# Altium PCB APD_Design.PcbDoc
Units mil, origin at the board's own origin, x right, y up, seen from the top; angles counter-clockwise.
Board outline 2700 x 2100 mil, 2 copper layers (Top Layer, Bottom Layer); 39 components, 17 nets, 140 pads, 12 vias.
Unrouted connection lines stored in the file: 2.
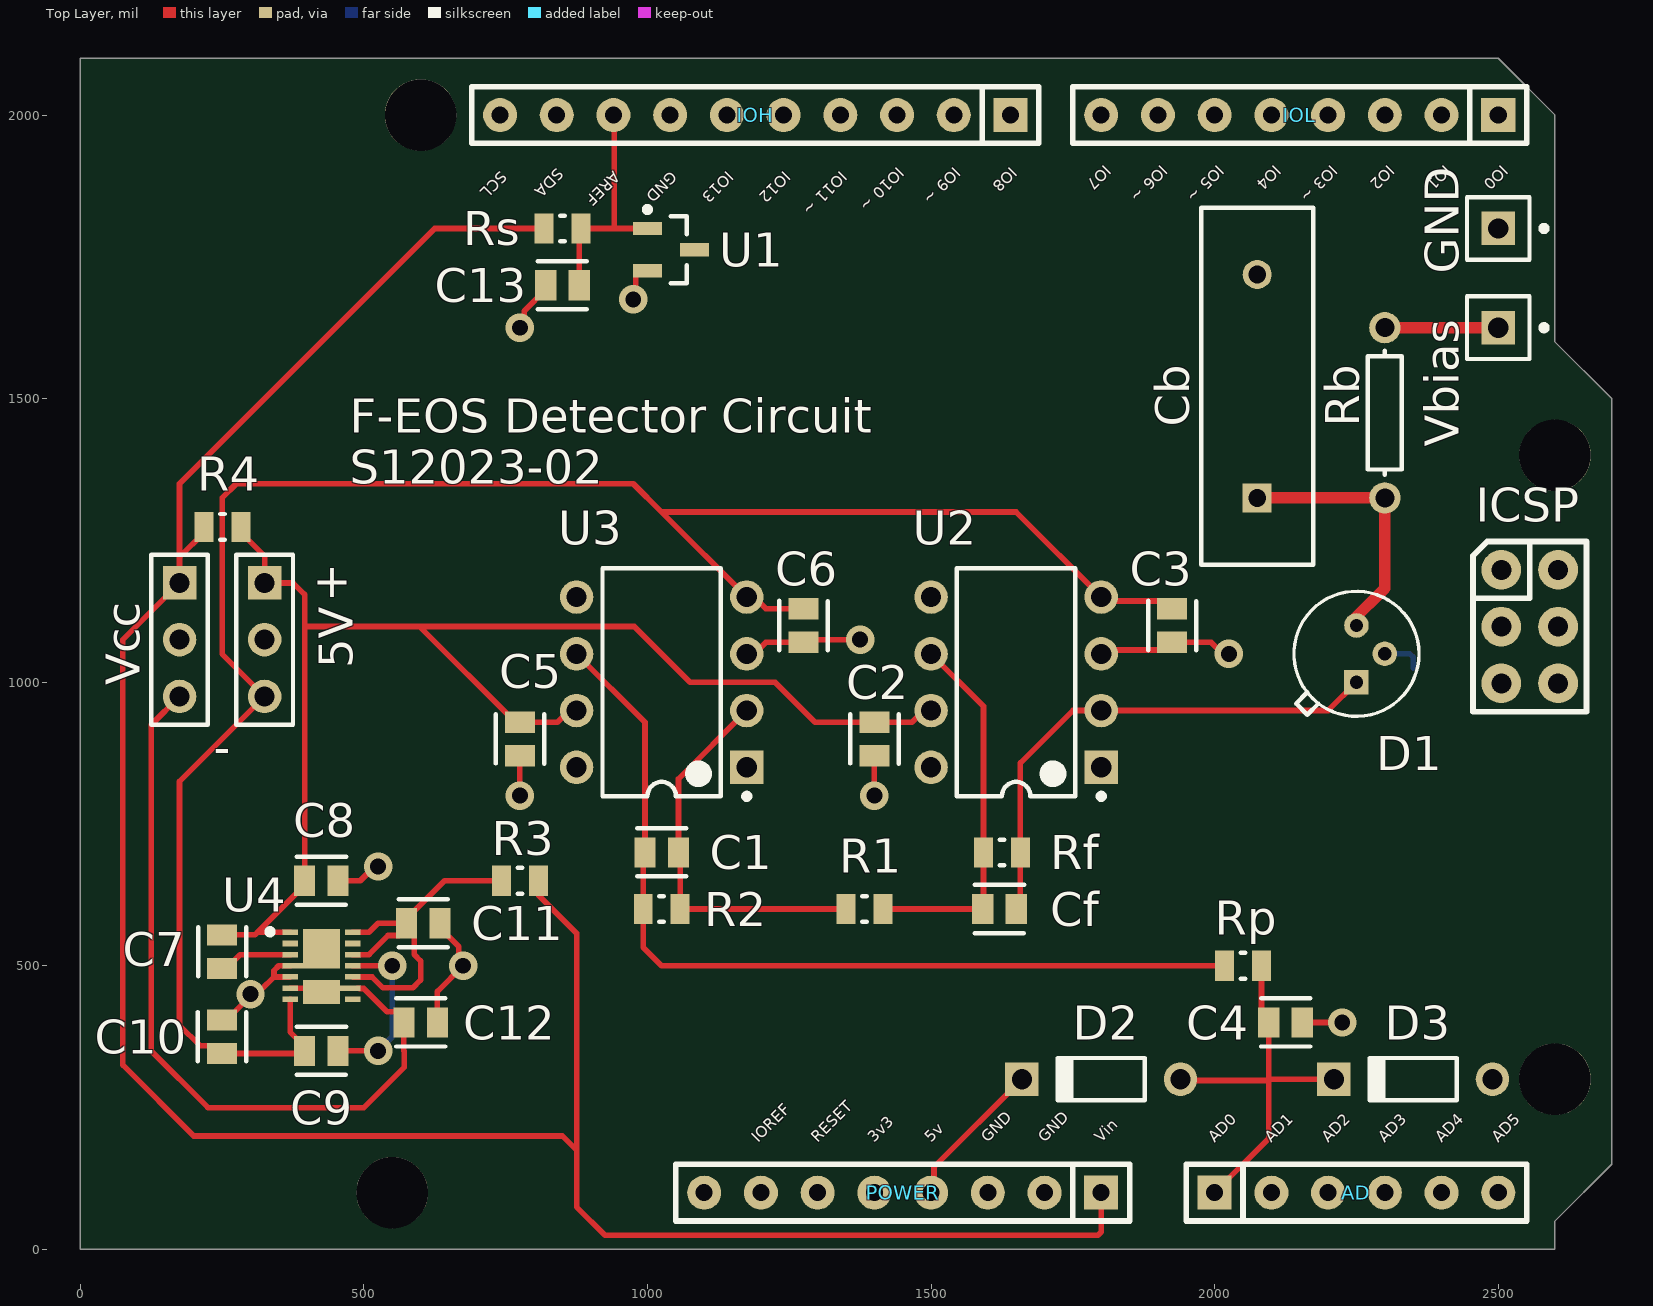
[diagram p0: Top Layer view]
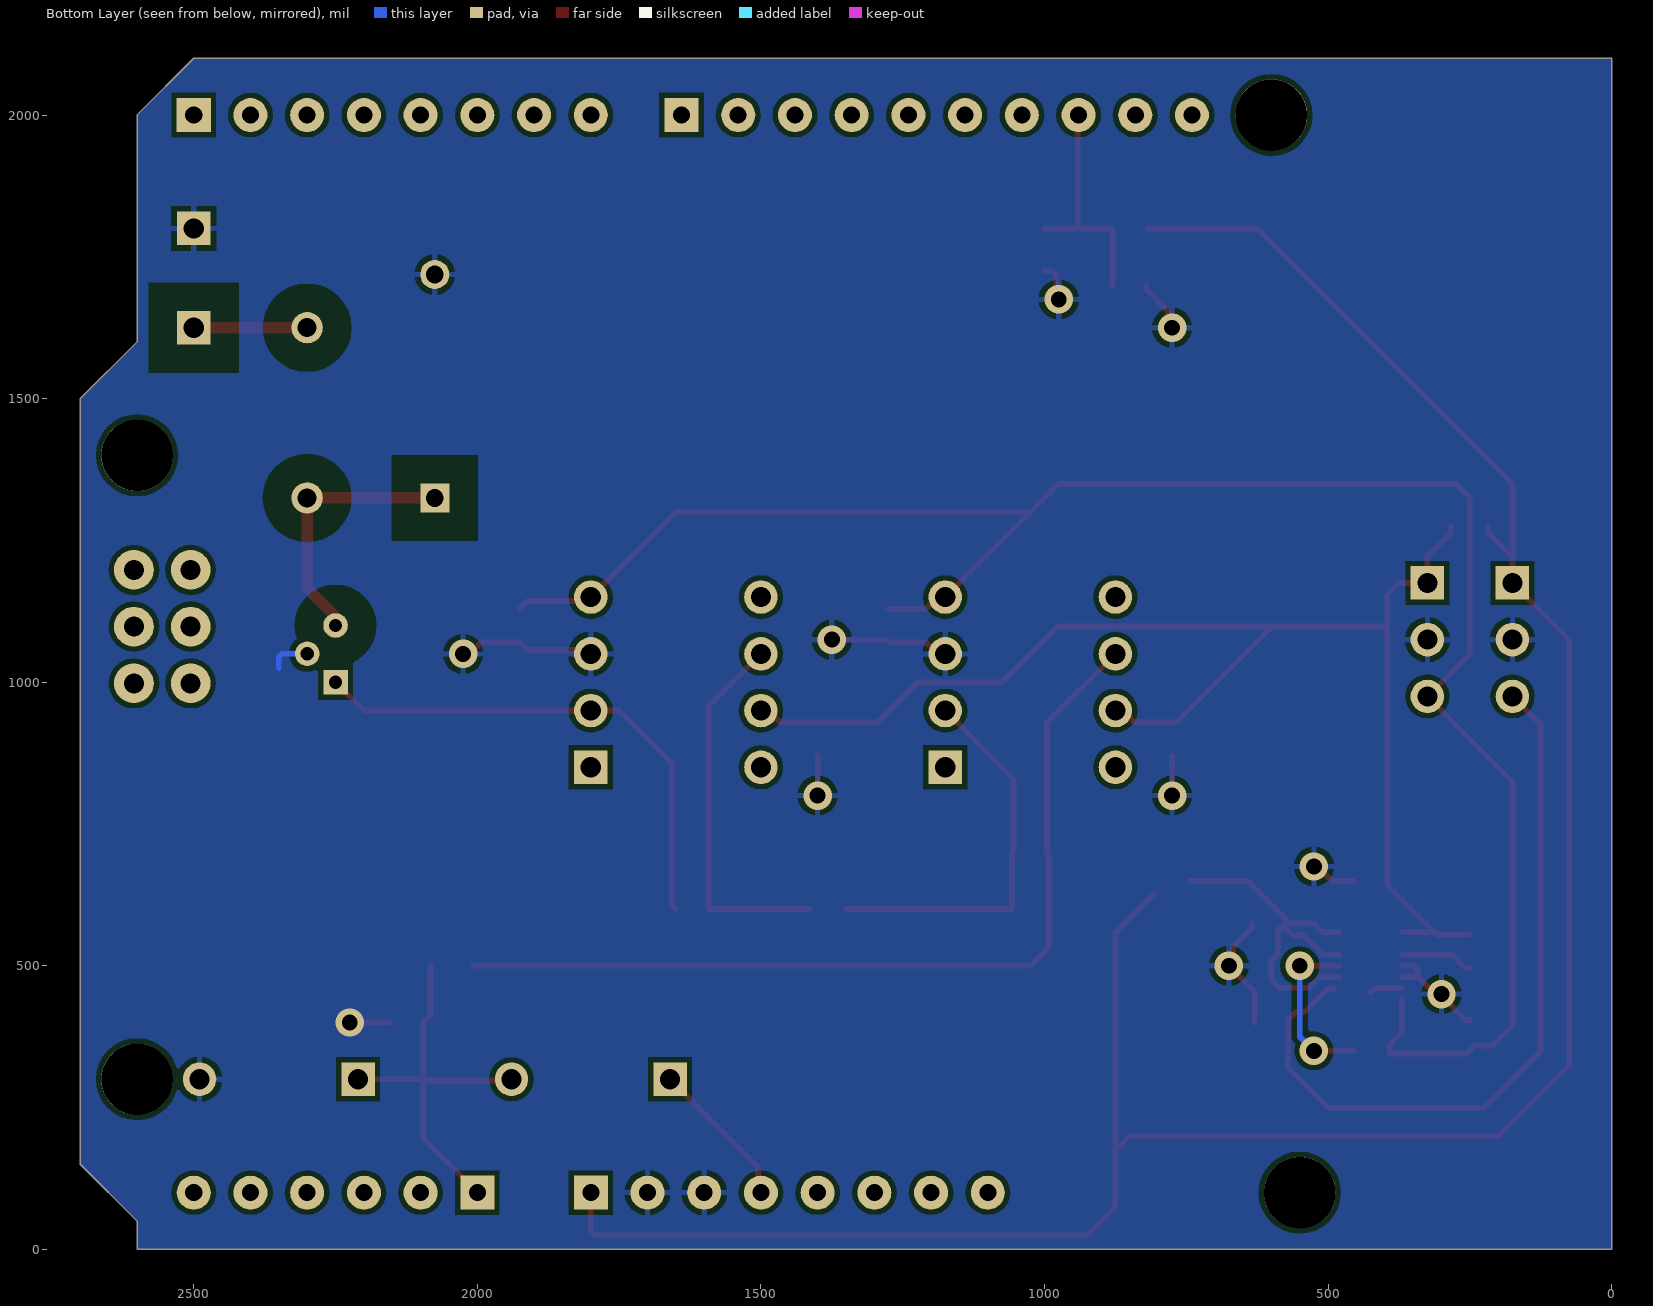
[diagram p1: Bottom Layer view, seen from below]
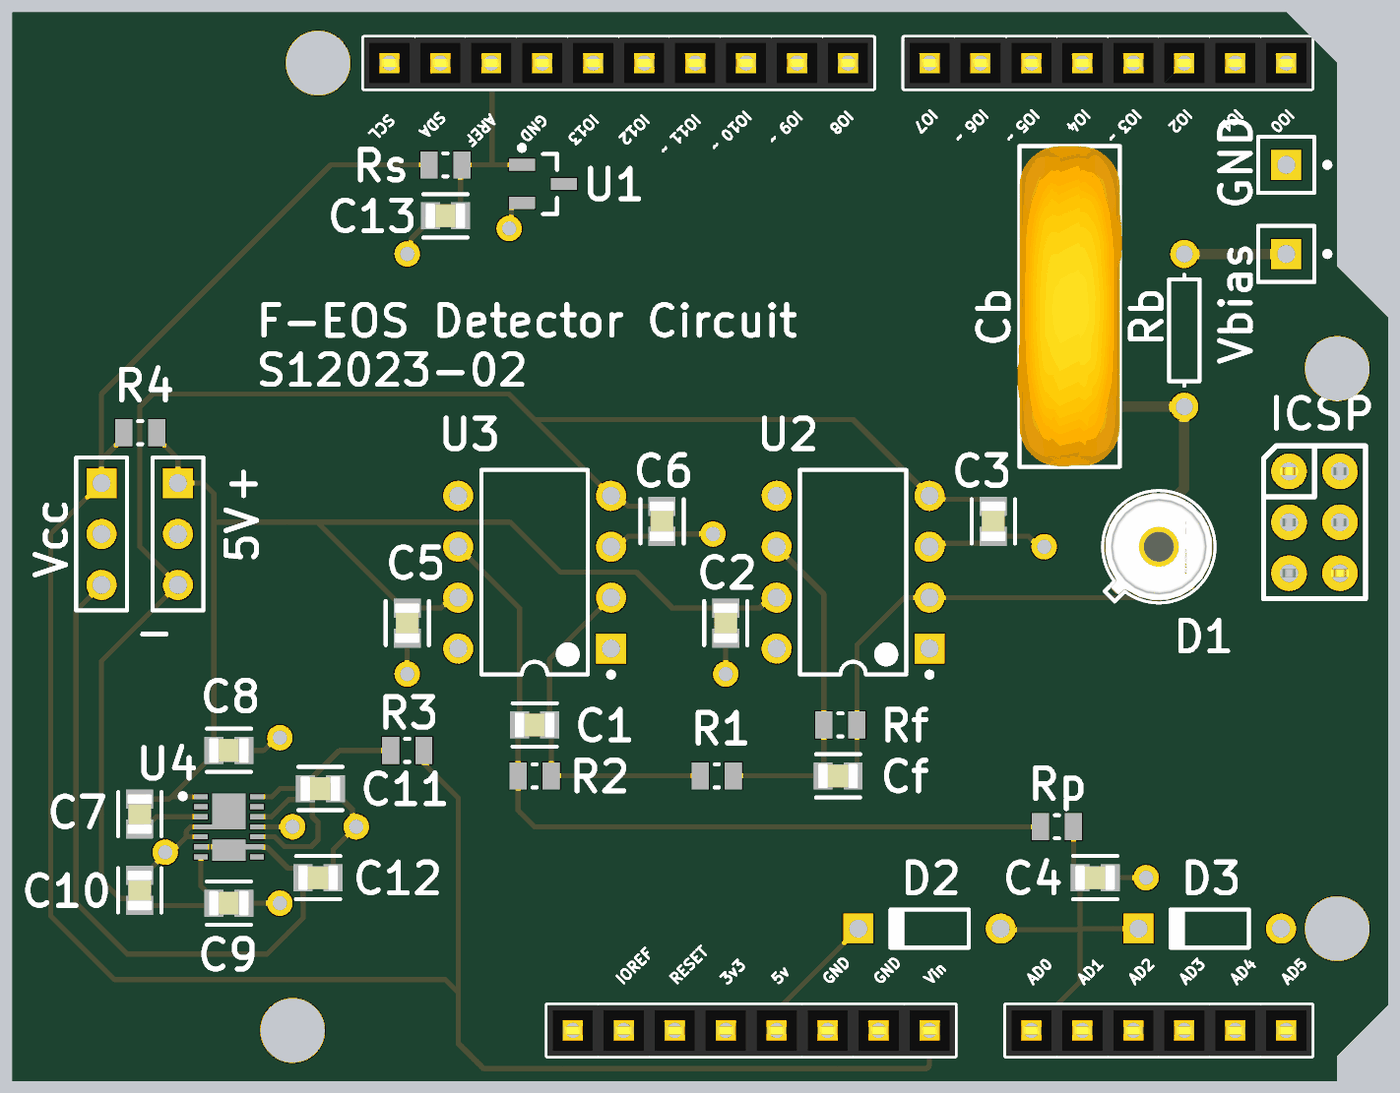
[diagram p2: 3D render of the assembled board from above, using the file's embedded part models]

## Layer stack, top to bottom
Top Solder: solder mask 0.4, Solder Resist, Dk 3.5
Top Layer: signal copper 1.4
Dielectric1: dielectric 12.6, FR-4, Dk 4.8
Bottom Layer: signal copper 1.4
Bottom Solder: solder mask 0.4, Solder Resist, Dk 3.5

## Board outline
0,0 0,2100 2500,2100 2600,2000 2600,1600 2700,1500 2700,150 2600,50 2600,0

## Design rules (kind name [scope] priority, off if disabled: settings)
Clearance Clearance_HV [InNetClass('HV')] p1: gap=50 ignorepadtopadclearanceinfootprint=FALSE
Clearance [All] p2: gap=9 ignorepadtopadclearanceinfootprint=TRUE
MinimumSolderMaskSliver [All] p1: minsoldermaskwidth=4
PolygonConnect [All] p1: connectstyle=Relief reliefconductorwidth=10 reliefentries=4 polygonreliefangle="90 Angle" airgapwidth=10
RoutingVias [All] p1: holewidth=28 width=50 viastyle="Through Hole" minholewidth=28 minwidth=50 maxholewidth=28 maxwidth=50
ShortCircuit ShortCircuit_GND [InNet('GND') vs InNet('GND')] p1: allowed=TRUE
ShortCircuit ShortCircuit_GND_1 [InNet('GND') vs InNet('GND')] p2: allowed=TRUE
ShortCircuit [All] p3: allowed=FALSE
SilkToSolderMaskClearance SilkscreenOverComponentPads [IsPad] p1: minsilkscreentomaskgap=10 clearancetoexposedcopper=TRUE
SolderMaskExpansion [All] p1: expansion=2.5 istentingtop=FALSE
Width Width_Power [InNetClass('Power')] p1: maxlimit=10 minlimit=6 preferedwidth=10 bottomlayer_minwidth=10 minimp=50.000000 maximp=50.000000 favimp=50.000000
Width Width_HV [InNetClass('HV')] p2: maxlimit=20 minlimit=20 preferedwidth=20
Width [All] p3: maxlimit=10 minlimit=10 preferedwidth=10
27 further rules are at their usual default settings.

## Classes and differential pairs
net class Power: +5 +Vcc -5 -Vcc NetC11_2
net class HV: NetCb_1 Vbias

## Components (designator, comment, footprint, x,y, rotation, side; value= is the part's Value field where it differs from the comment)
5V "5V" HDR1X3 325,1175 r270 top
AD "AD" "Header 6x1 8.5mm" 2000,100 r0 top locked
C1 "" FP-C0805C-DG-MFG 1025,700 r180 top value=10uF
C2 ".1u" FP-C0805C-DG-MFG 1400,900 r90 top value=10uF
C3 ".1u" FP-C0805C-DG-MFG 1925,1100 r90 top value=10uF
C4 "10n" FP-C0805C-DG-MFG 2125,400 r180 top value=10uF
C5 ".1u" FP-C0805C-DG-MFG 775,900 r90 top value=10uF
C6 ".1u" FP-C0805C-DG-MFG 1275,1100 r90 top value=10uF
C7 "0.01u" FP-C0805C-DG-MFG 250,525 r90 top value=10uF
C8 "10u" FP-C0805C-DG-MFG 425,650 r180 top value=10uF
C9 "0.01u" FP-C0805C-DG-MFG 425,350 r180 top value=10uF
C10 "10u" FP-C0805C-DG-MFG 250,375 r270 top value=10uF
C11 "10u" FP-C0805C-DG-MFG 604.53,575 r180 top value=10uF
C12 "10u" FP-C0805C-DG-MFG 600,400 r180 top value=10uF
C13 "10u" FP-C0805C-DG-MFG 850,1700 r0 top value=10uF
Cb "400V" FP-VY1472M63Y5UQ6TV0-MFG 2075,1521.85 r90 top
Cf "" FP-C0805C-DG-MFG 1620.47,600 r180 top value=10uF
D1 "S12023-02" FP-S12023-02-MFG 2250,1050 r270 top
D2 "Diode 1N4148" DO-35 1800,300 r180 top
D3 "Diode 1N4148" DO-35 2350,300 r180 top
GND "Plug" PIN1 2500,1800 r270 top
ICSP "ICSP" ICSP 2505.51,1198.03 r0 top locked
IOH "IOH" "Header 10x1 8.5mm" 1640,2000 r180 top locked
IOL "IOL" "Header 8x1 8.5mm" 2500,2000 r180 top locked
POWER "POWER_UNO" "Header 8x1 8.5mm" 1800,100 r180 top locked
R1 "CRCW08050000Z0EA" RESC2013X50X30LL20T20 1382.48,600 r180 top
R2 "CRCW08050000Z0EA" RESC2013X50X30LL20T20 1025,600 r180 top
R3 "0" RESC2013X50X30LL20T20 775,650 r180 top
R4 "0" RESC2013X50X30LL20T20 250.93,1273.96 r180 top
Rb "Res1" AXIAL-0.3 2300,1475 r90 top value=1M
Rf "" RESC2013X50X30LL20T20 1625,700 r180 top
Rp "10" RESC2013X50X30LL20T20 2050,500 r0 top
Rs "CRCW08050000Z0EA" RESC2013X50X30LL20T20 850,1800 r180 top
U1 "LM4040DIM3-4.1/NOPB" MF03A_N 1041.34,1762.6 r0 top
U2 "OP07CP" P0008A 1650,1000 r180 top
U3 "OP07CP" P0008A 1025,1000 r180 top
U4 "LT3032IDE-5#PBF" LT-DE14MA-14_V 425,500 r0 top
Vbias "Plug" PIN1 2500,1625 r270 top
Vcc "Vcc" HDR1X3 175,1175 r270 top

## Footprints (in the part's own frame and the unit in brackets; to place one, negate y for a bottom-side part, rotate by r counter-clockwise, add the part's x,y. Pads: shape width x height; smd on the part's side, far side on the other; paste and mask are expansions set on the pad)
AXIAL-0.3 [mm] "Axial Device, Thru-Hole; 2 Leads; 0.3 in Pin Spacing"
  round 1.4 hole 0.85: 1(-3.81,0) 2(3.81,0)
  silkscreen extent -2.77,-0.76 2.77,0.76
DO-35 [mm] "Diode, Axial; Body 3.8 x 1.9 mm (LxDia. max), Lead Dia. 0.53 mm (max)"
  round 1.5 hole 0.9: 1(-3.55,0)
  rect 1.5x1.5 hole 0.9: 2(3.55,0)
  silkscreen extent -1.95,-0.95 2.05,0.95
FP-C0805C-DG-MFG [mm]
  rect 0.95x1.35 smd paste+0 mask+0: 1(-0.75,0) 2(0.75,0)
  silkscreen extent -1.11,-1.08 1.1,1.07, body extent -1.4,-0.85 1.4,0.85, height 0.25
FP-S12023-02-MFG [mm]
  rect 1.1x1.1 hole 0.6 paste-1000 mask+0: 1(1.27,0)
  round 1.1 hole 0.6 paste-1000 mask+0: 2(0,1.27) 3(-1.27,0)
  silkscreen extent -2.8,-2.8 2.8,2.8, body extent -2.9,-2.9 2.9,2.9, height 0.25
FP-VY1472M63Y5UQ6TV0-MFG [mm]
  rect 1.3x1.3 hole 0.8 paste-1000 mask+0: 1(-5,0)
  round 1.3 hole 0.8 paste-1000 mask+0: 2(5,0)
  silkscreen extent -8,-2.5 8,2.5, body extent -8.1,-2.6 8.1,2.6, height 0.25
HDR1X3 [mm] "Connector; Header; 3 Position"
  rect 1.5x1.5 hole 0.9: 1(0,0)
  round 1.5 hole 0.9: 2(2.54,0) 3(5.08,0)
  silkscreen extent -1.27,-1.27 6.35,1.27
"Header 6x1 8.5mm" [mil] "Stackable 6 pin header"
  rect 60x60 hole 30: 1(0,0)
  round 60 hole 30: 2(100,0) 3(200,0) 4(300,0) 5(400,0) 6(500,0)
  silkscreen extent -50,-50 550,50, body extent -50,-50 550,50, height 335
"Header 8x1 8.5mm" [mil] "Stackable 8 pin header"
  rect 60x60 hole 30: 1(0,0)
  round 60 hole 30: 2(100,0) 3(200,0) 4(300,0) 5(400,0) 6(500,0) 7(600,0) 8(700,0)
  silkscreen extent -50,-50 750,50, body extent -50,-50 750,50, height 335
"Header 10x1 8.5mm" [mil] "Stackable 10 pin header"
  rect 60x60 hole 30: 1(0,0)
  round 60 hole 30: 2(100,0) 3(200,0) 4(300,0) 5(400,0) 6(500,0) 7(600,0) 8(700,0) 9(800,0) 10(900,0)
  silkscreen extent -50,-50 950,50, body extent -50,-50 950,50, height 335
ICSP [mil]
  round 70 hole 35.43: 1(0,0) 2(100,0) 3(0,-100) 4(100,-100) 5(0,-200) 6(100,-200)
  silkscreen extent -50,-250 150,50, body extent -50,-250 150,50, height 485
LT-DE14MA-14_V [mm] "DE14MA, 14-Leads, Body 4x3mm, Pitch 0.5mm"
  rect 0.7x0.25 smd: 1(-1.4,1.5) 2(-1.4,1) 3(-1.4,0.5) 4(-1.4,0) 5(-1.4,-0.5) 6(-1.4,-1) 7(-1.4,-1.5) 8(1.4,-1.5) 9(1.4,-1) 10(1.4,-0.5) 11(1.4,0) 12(1.4,0.5) 13(1.4,1) 14(1.4,1.5)
  rect 1.65x1.78 smd: 15(0,0.765)
  rect 1.65x1.07 smd: 16(0,-1.17)
  rect 0.3x0.25 smd: ""(-0.97,0)
  rect 0.5x0.25 smd: ""(0.9,-1)
  silkscreen extent -2.42,1.4 -2.17,1.65, body extent -1.5,-2 1.5,2, height 0.75
MF03A_N [mm] "SOT23, 3-Leads, Body 2.9x1.3mm, Pitch 0.95mm, Lead Span 2.4mm, IPC Medium Density"
  rect 1.3x0.6 smd: 1(-1.05,0.95) 2(-1.05,-0.95) 3(1.05,0)
  silkscreen extent -1.17,-1.5 0.7,1.92, body extent -0.7,-1.52 0.7,1.52, height 1.12
P0008A [mm] "DIP, 8-Leads, Body 10.15x6.6mm, Pitch 2.54mm"
  rect 1.5x1.5 hole 0.9: 1(-3.81,3.81)
  round 1.5 hole 0.9: 2(-3.81,1.27) 3(-3.81,-1.27) 4(-3.81,-3.81) 5(3.81,-3.81) 6(3.81,-1.27) 7(3.81,1.27) 8(3.81,3.81)
  silkscreen extent -3.94,-5.1 2.65,5.23, body extent -3.95,-5.07 3.95,5.07, height 5.08
PIN1 [mm] "Connector; Plug"
  rect 1.5x1.5 hole 0.9: 1(0,0)
  silkscreen extent -1.4,-1.4 1.4,2.18
RESC2013X50X30LL20T20 [mm] "Chip Resistor, 2-Leads, Body 2.00x1.25mm, IPC High Density"
  rect 0.85x1.35 smd: 1(-0.825,0) 2(0.825,0)
  silkscreen extent -0.1,-0.58 0.1,0.58, body extent -1.1,-0.72 1.1,0.72, height 0.5

## Part data
5V Vcc: library part "Header 3", "Header, 3-Pin", LatestRevisionDate=17-Jul-2002, LatestRevisionNote="Re-released for DXP Platform.", Publisher="Altium Limited"
C1 C2 C3 C4 C5 C6 C7 C8 C9 C10 C11 C12 C13 Cf: library part CMP-2007-03243-2, "CAP CER 10UF 10V X5R 0805", 3DS Part Number=220-00001, Capacitance=10uF, Manufacturer=Kemet, Manufacturer Part Number=C0805C106K8PACTU, Package=C0805C-DG, Temperature="-55°C to +85°C", Temperature Characteristic=X5R, Temperature Coefficient=15%, Temperature Range High=+85°C, Temperature Range Low=-55°C, Tolerance=10%, Voltage=10V, Automotive=No, Category=Cap, ComponentLink2Description=Datasheet, ComponentLink2URL=https://content.kemet.com/datasheets/KEM_C1006_X5R_SMD.pdf, Device Class L1="Passive Components", Device Class L2=Capacitors, Device Class L3="Ceramic Capacitors", Digikey Description="CAP CER 10UF 10V X5R 0805", Height=1.4mm, Ipc Land Pattern Name=CAPC200125X125, Lead Free=Yes, Material=Ceramic, Mouser Description="CAP CER 10UF 10V X5R 0805", Octopart=https://octopart.com/c0805c106k8pactu-kemet-98697, RoHS=TRUE, Voltage Rating=10V
Cb: library part CMP-02417-000050-1, "CAP CER 4700PF 760VAC Y5U RADIAL", Capacitance=4.7nF, Case/Package=Radial, Dielectric=Y5U, Max Operating Temperature=125°C, Min Operating Temperature=-40°C, Package Quantity=500, Resistor Type=Ceramic, Tolerance=20%, Voltage=500V, Construction=RADIAL, Contact Plating=Tin, Depth=5mm, Diameter=16mm, Height=19mm, Height - Seated (Max)=0.787inch, Lead Diameter=0.6mm, Lead Pitch=10mm, Lead/Base Style=Kinked, Mount="Through Hole", Packaging="Tape and Reel", Radiation Hardening=No, RoHS Compliant=Yes, Series=VY1, Termination=Radial, Thickness=5mm, Voltage Rating (AC)=500V, Voltage Rating (DC)=500V
D1: library part CMP-218204-000005-1, "IR-photodiode Package: TO-18 Wavelength of max. photosensitivity: 800 nm", RoHS Compliant=Yes
D2 D3: "High Conductance Fast Diode", Code_JEDEC=DO-204-AH, ComponentLink1Description="Manufacturer Link", ComponentLink1URL=http://www.fairchildsemi.com/, ComponentLink2Description=Datasheet, ComponentLink2URL=http://www.fairchildsemi.com/ds/1N%2F1N4148.pdf, DatasheetVersion=1997, LatestRevisionDate=17-Jul-2002, LatestRevisionNote="Re-released for DXP Platform.", PackageDescription="Diode, Axial; Body 3.8 x 1.9 mm (LxDia. max), Lead Dia. 0.53 mm (max)", PackageReference=DO-35, Published=8-Jun-2000, Publisher="Altium Limited"
R1 R2 Rs: library part CMP-2001-04896-1, Manufacturer="Vishay Dale", Part Number=CRCW08050000Z0EA
R3 R4 Rf Rp: library part CMP-2001-04896-1, Manufacturer="Vishay Dale", Part Number=CRCW08050000Z0EA
Rb: "Resistor", LatestRevisionDate=17-Jul-2002, LatestRevisionNote="Re-released for DXP Platform.", PackageDescription="Axial Device, Thru-Hole; 2 Leads; 0.3 in Pin Spacing", PackageReference=AXIAL-0.3, Published=8-Jun-2000, Publisher="Altium Limited"
U1: library part CMP-0074-00604-2, "Precision Micropower Shunt Voltage Reference, 3-pin SOT-23, Pb-Free", Manufacturer="National Semiconductor", PackageTopMarking=R4D*XTT, PowerWise=N, ComponentLink1Description="LM4040 Datasheet", ComponentLink1URL=http://www.national.com/ds/LM/LM4040.pdf, ComponentLink2Description="LM4040 Web Page", ComponentLink2URL=http://www.national.com/pf/LM/LM4040.html, ComponentLink3Description="MF03A Package Page", ComponentLink3URL=http://www.national.com/packaging/folders/mf03a.html, CompType="Voltage Reference IC", DatasheetVersion=Apr-2005, PackageDescription="Molded SOT-23, .115 x .051 x .037in Body, 3 Lead, .075 in Pitch", PackageReference=MF03A, PackageVersion="revB, Mar-2003", PinCount=3, RevisionNote="Component URLs added", RoHS=Y
U2 U3: library part CMP-0017-00916-2, "Low-Offset Voltage Operational Amplifier, 6 to 36 V, 0 to 70 degC, 8-pin DIP (P8), Pb-Free (RoHS)", Manufacturer="Texas Instruments", Rating=Catalog, Total Supply Voltage(Max)(+5V is 5, +/-5V is 10)=36, Total Supply Voltage(Min)(+5V is 5, +/-5V is 10)=6, CMRR(Min)(dB)=100, Code_JEDEC=MS-001, ComponentLink1Description="Manufacturer URL", ComponentLink1URL=http://www.ti.com/, ComponentLink2Description=Datasheet, ComponentLink2URL=http://www.ti.com/lit/ds/symlink/op07c.pdf, ComponentLink3Description="Package Specification", ComponentLink3URL=http://www.ti.com/litv/pdf/mpdi001b, DatasheetVersion=SLOS099E, Eco-Plan="Pb-Free (RoHS)", GBW(Typ)(MHz)=0.6, IIB(Max)(pA)=7000, Iq per channel(Max)(mA)=5, Mounting Technology="Through Hole", Number of Channels=1, Offset Drift(Typ)(uV/C)=0.5, PackageDescription="8-Pin Plastic In-Line, Body 9.59 x 6.35 mm, Pitch 2.54 mm", PackageReference=P0008A, PackageVersion="4040082/E, 04/2010", PartNumber=OP07CP, Slew Rate(Typ)(V/us)=0.3, Sub Family="General Purpose Amplifier, High Supply Voltage Amplifier (>=30V), Low Noise Amp (<=10nV/rtHz), Low Offset Voltage Amplifier (<=500uV)", Vio (25C)(Max)(mV)=0.15, Vn at 1kHz(Typ)(nV/rtHz)=9.8
U4: library part CMP-0476-00362-1, "Dual 150 mA Positive / Negative Low Noise Low Dropout Linear Regulator, +/-2.3 to +/-20 V Vin, +/-5 V Vout, 14-pin SON (DE14MA-14), -40 to 125 degC, Pb-Free", Dropout Voltage(V)=0.3, Manufacturer="Linear Technology", Output Voltage=+/-5V, Shutdown Current(uA)=0.1, ComponentLink1Description="Manufacturer URL", ComponentLink1URL=http://www.linear.com/, ComponentLink2Description=Datasheet, ComponentLink2URL=http://cds.linear.com/docs/en/datasheet/3032fd.pdf, ComponentLink3Description="Package Specification", ComponentLink3URL=http://cds.linear.com/docs/en/packaging/DFN_14_05-08-1731.pdf, DatasheetVersion="Rev. D", Discrete Pass Element=no, Iout(mA)=150, Isupply(mA)=0.025, Mounting Technology="Surface Mount", Noise(uV)=30, Number of Outputs=2, PackageDescription="14-Pin Plastic DFN, Body 4 x 3 mm, Pitch 0.5 mm", PackageReference=DE14MA-14, PackageVersion="Rev. A, 06/2010", PartNumber=LT3032IDE-5#PBF, PSRR(dB)=68, RoHS=TRUE, Vin Max(V)=+/-20, Vin Min(V)=+/-2.3, Vout Max(V)=+/-5, Vout Min(V)=+/-5
GND Vbias: LatestRevisionDate=17-Jul-2002, LatestRevisionNote="Re-released for DXP Platform.", Publisher="Altium Limited"

## Free pads (board coordinates)
  round 125.98 hole 125.98: 0(550,100) 0(600,2000) 0(2600,300) 0(2600,1400)

## Via types
v1: diameter 50, hole 28, Top Layer to Bottom Layer, 12 vias

## Nets (pads, with @x,y where several pads share a name; then routed paths per layer and width w, separated by ;. In a path a pad name is that pad's centre, name@x,y a point inside that pad or via, vN(x,y) a via of type N, cw(c..) or ccw(c..) an arc to the next point about the centre after c; other vN are vias at no path point)
5V_Arduino: D2.2 POWER.4 | length 266.4
  Top Layer w10: POWER.4 1505.24,105.24 1505.24,145 D2.2
+5: 5V.1 C2.2 C5.2 C7.2 C8.2 R4.1 U2.7 U3.7 U4.1 | length 2484.8
  Top Layer w10: C7.2 307.87,554.53 312.4,559.06 ; R4.1 283.41,1264.12 325,1222.52 5V.1 375,1175 395.47,1154.53 395.47,1098.33 ; U4.1 312.4,559.06 ; U3.7 861.73,950 841.25,929.53 C5.2 767.13,929.53 598.33,1098.33 ; U2.7 1486.73,950 1466.25,929.53 C2.2 1295.47,929.53 1225,1000 1075,1000 976.67,1098.33 598.33,1098.33 ; 312.4,559.06 395.47,642.13 C8.2 395.47,1098.33 ; 395.47,1098.33 598.33,1098.33
+Vcc: POWER.1 R3.1 R4.2 Rs.2 Vcc.1 | length 4424
  Top Layer w10: R4.2 218.45,1264.12 175,1220.67 ; R3.1@807.48,625 875,557.48 875,175 ; Rs.2 625,1800 175,1350 175,1220.67 ; POWER.1 1800,30.86 1794.14,25 925,25 875,75 875,175 ; 175,1220.67 Vcc.1 75,1075 75,325 200,200 850,200 875,175
-5: 5V.3 C3.2 C6.2 C9.2 C10.2 U2.4 U3.4 U4.7 | length 3461.1
  Top Layer w10: U4.7 369.88,383.46 390.94,362.4 390.94,345.47 254.53,345.47 240.83,359.17 210.83,359.17 175,395 175,825 5V.3 250,1050 250,1325 275,1350 975,1350 1025,1300 ; C6.2 1208.75,1129.53 1188.27,1150 U3.4 1025,1300 ; C3.2 1911.3,1143.23 1806.77,1143.23 U2.4 1650,1300 1025,1300
-Vcc: C12.2 U4.6 U4.9 U4.16 Vcc.3 | length 1409.3
  Top Layer w10: Vcc.3 125,925 125,350 225,250 500,250 570.86,320.86 570.86,349.45 570.47,349.83 570.47,405.2 556.77,418.9 540.66,418.9 499.7,459.87 492.62,459.87 491.86,460.63 U4.9@488.9,460.63 ; U4.6 418.31,460.63 U4.16
AD0: AD.1 C4.2 D2.1 D3.2 Rp.2 | length 717.3
  Top Layer w10: D2.1 1942.03,297.74 2095.47,297.74 ; AD.1 2095.47,195.47 2095.47,297.74 ; Rp.2 2082.48,412.99 C4.2 2095.47,297.74 ; D3.2 2097.74,300 2095.47,297.74
AREF: C13.2 IOH.8 Rs.1 U1.1 | length 419.3
  Top Layer w10: C13.2 879.53,1797.05 Rs.1 941.24,1800 ; IOH.8 941.24,1998.76 941.24,1800 ; U1.1 941.24,1800
GND: 5V.2 C2.1 C3.1 C4.1 C5.1 C6.1 C8.1 C10.1 C11.1 C12.1 C13.1 Cb.2 D1.2 D3.1 GND.1 POWER.2 POWER.3 U1.2 U2.3 U3.3 U4.4 U4.5 U4.15 Vcc.2 | length 1385.7
  Top Layer w10: C10.1 257.87,404.53 300,446.65 v1(300,450) 307.65,457.65 318.83,457.65 341.5,480.32 ; U4.5 341.5,480.32 ; U4.4 350,500 341.5,491.5 341.5,480.32 ; C8.1 493.43,650 518.43,675 v1(525,675) ; C12.1 629.53,454.53 v1(675,500) 667.35,507.65 667.35,533.83 634.06,567.13 C11.1 ; v1(775,800) C5.1 ; v1(775,1625) 782.65,1632.65 782.65,1654.31 820.47,1692.13 C13.1 ; v1(975,1675) 979.41,1679.41 979.41,1718.39 986.22,1725.2 U1.2 ; U3.3 1188.27,1050 1208.75,1070.47 C6.1 1279.53,1075 v1(1375,1075) ; v1(1400,800) C2.1 ; U2.3 1806.77,1056.77 1911.3,1056.77 C3.1 1993.7,1070.47 2014.18,1050 v1(2025,1050) ; C4.1 v1(2225,400)
  Bottom Layer w10: D1.2 2344.14,1050 2350,1044.14 2350,1025
NetC1_1: C1.1 R1.2 R2.1 U3.2 | length 693.6
  Top Layer w10: U3.2 1054.53,829.53 C1.1 1057.48,697.05 R2.1 R1.2
NetC1_2: C1.2 R2.2 Rp.1 U3.6 | length 1597.1
  Top Layer w10: U3.6 995.47,929.53 C1.2 992.52,697.05 R2.2 992.52,532.48 1025,500 Rp.1@2007.48,500
NetC7_1: C7.1 U4.3 | length 129.9
  Top Layer w10: C7.1 257.87,495.47 282.09,519.68 U4.3
NetC9_1: C9.1 U4.11 | length 300.7
  Top Layer w10: C9.1 v1(525,350) ; U4.11 v1(550,500)
  Bottom Layer w10: v1(525,350) 550,375 v1(550,500)
NetC11_2: C11.2 R3.2 U4.10 U4.12 U4.14 | length 672
  Top Layer w10: U4.10 514.53,480.32 533.85,461 586,461 600,475 600,508.56 588.7,519.86 588.7,561.3 C11.2 ; U4.12 508.9,519.68 542.64,553.43 561.3,553.43 575,567.13 C11.2 ; U4.14 509.06,559.06 525,575 C11.2 ; R3.2@743.38,650 642.13,650 575,582.87 C11.2
NetCb_1: Cb.1 D1.3 Rb.1 | length 466.2
  Top Layer w20: Cb.1 Rb.1 2300,1165.48 D1.3@2242.26,1107.74
NetCf_1: Cf.1 D1.1 Rf.1 U2.2 | length 912.1
  Top Layer w10: Cf.1 1657.48,607.48 Rf.1 1657.48,857.48 1750,950 U2.2 2200,950 D1.1
NetCf_2: Cf.2 R1.1 Rf.2 U2.6 | length 665
  Top Layer w10: R1.1 Cf.2 1592.52,601.57 Rf.2 1592.52,957.48 U2.6
Vbias: Rb.2 Vbias.1 | length 200
  Top Layer w20: Rb.2 Vbias.1
pads on no net: AD.2 AD.3 AD.4 AD.5 AD.6 ICSP.1 ICSP.2 ICSP.3 ICSP.4 ICSP.5 ICSP.6 IOH.1 IOH.2 IOH.3 IOH.4 IOH.5 IOH.6 IOH.7 IOH.9 IOH.10 IOL.1 IOL.2 IOL.3 IOL.4 IOL.5 IOL.6 IOL.7 IOL.8 POWER.5 POWER.6 POWER.7 POWER.8 U1.3 U2.1 U2.5 U2.8 U3.1 U3.5 U3.8 U4. U4.2 U4.8 U4.13

## Polygon pours and split planes (outlines as drawn)
GND on Bottom Layer "GND_L02_P000" (solid, pour order 0): 0,0 0,2100 2500,2100 2600,2000 2600,1600 2700,1500 2700,150 2600,50 2600,0

## Silkscreen, mask and mechanical layers (free items; w line width, h text height)
Top Overlay:
  text "IO7" at 1805,1912.93 h20 r225
  text "IO6 ~" at 1905,1912.93 h20 r225
  text "IO5 ~" at 2005,1912.93 h20 r225
  text "IO4" at 2105,1912.93 h20 r225
  text "IO3 ~" at 2205,1912.93 h20 r225
  text "IO2" at 2305,1912.93 h20 r225
  text "IO1" at 2405,1912.93 h20 r225
  text "IO0" at 2505,1912.93 h20 r225
  text "IO10 ~" at 1440,1910 h20 r225
  text "IO9 ~" at 1540,1910 h20 r225
  text "IO8" at 1640,1910 h20 r225
  text "SDA" at 840,1907.93 h20 r225
  text "SCL" at 740,1902.93 h20 r225
  text "AREF" at 940,1902.93 h20 r225
  text "GND" at 1040,1902.93 h20 r225
  text "IO13" at 1140,1902.93 h20 r225
  text "IO12" at 1240,1902.93 h20 r225
  text "IO11 ~" at 1340,1902.93 h20 r225
  text "F-EOS Detector Circuit / S12023-02" at 475,1350 h60
  text "+" at 410,1150 h60
  text "-" at 235,855.01 h60
  text "IOREF" at 1195,187.07 h20 r45
  text "RESET" at 1300,187.07 h20 r45
  text "3v3" at 1400,187.07 h20 r45
  text "5v" at 1500,187.07 h20 r45
  text "GND" at 1600,187.07 h20 r45
  text "GND" at 1700,187.07 h20 r45
  text "Vin" at 1800,187.07 h20 r45
  text "AD0" at 2000,187.07 h20 r45
  text "AD1" at 2100,187.07 h20 r45
  text "AD2" at 2200,187.07 h20 r45
  text "AD3" at 2300,187.07 h20 r45
  text "AD4" at 2400,187.07 h20 r45
  text "AD5" at 2500,187.07 h20 r45
Mechanical 1:
  circle w5: c2600,1400 r62.99
  circle w5: c550,100 r62.99
  circle w5: c2600,300 r62.99
  circle w5: c600,2000 r62.99
  lines w5: 0,0 2600,0 2600,50 2700,150 2700,1500 2600,1600 2600,2000 2500,2100 0,2100 0,0